# EAGLE board motherboard_clean (EAGLE 8.5.0)
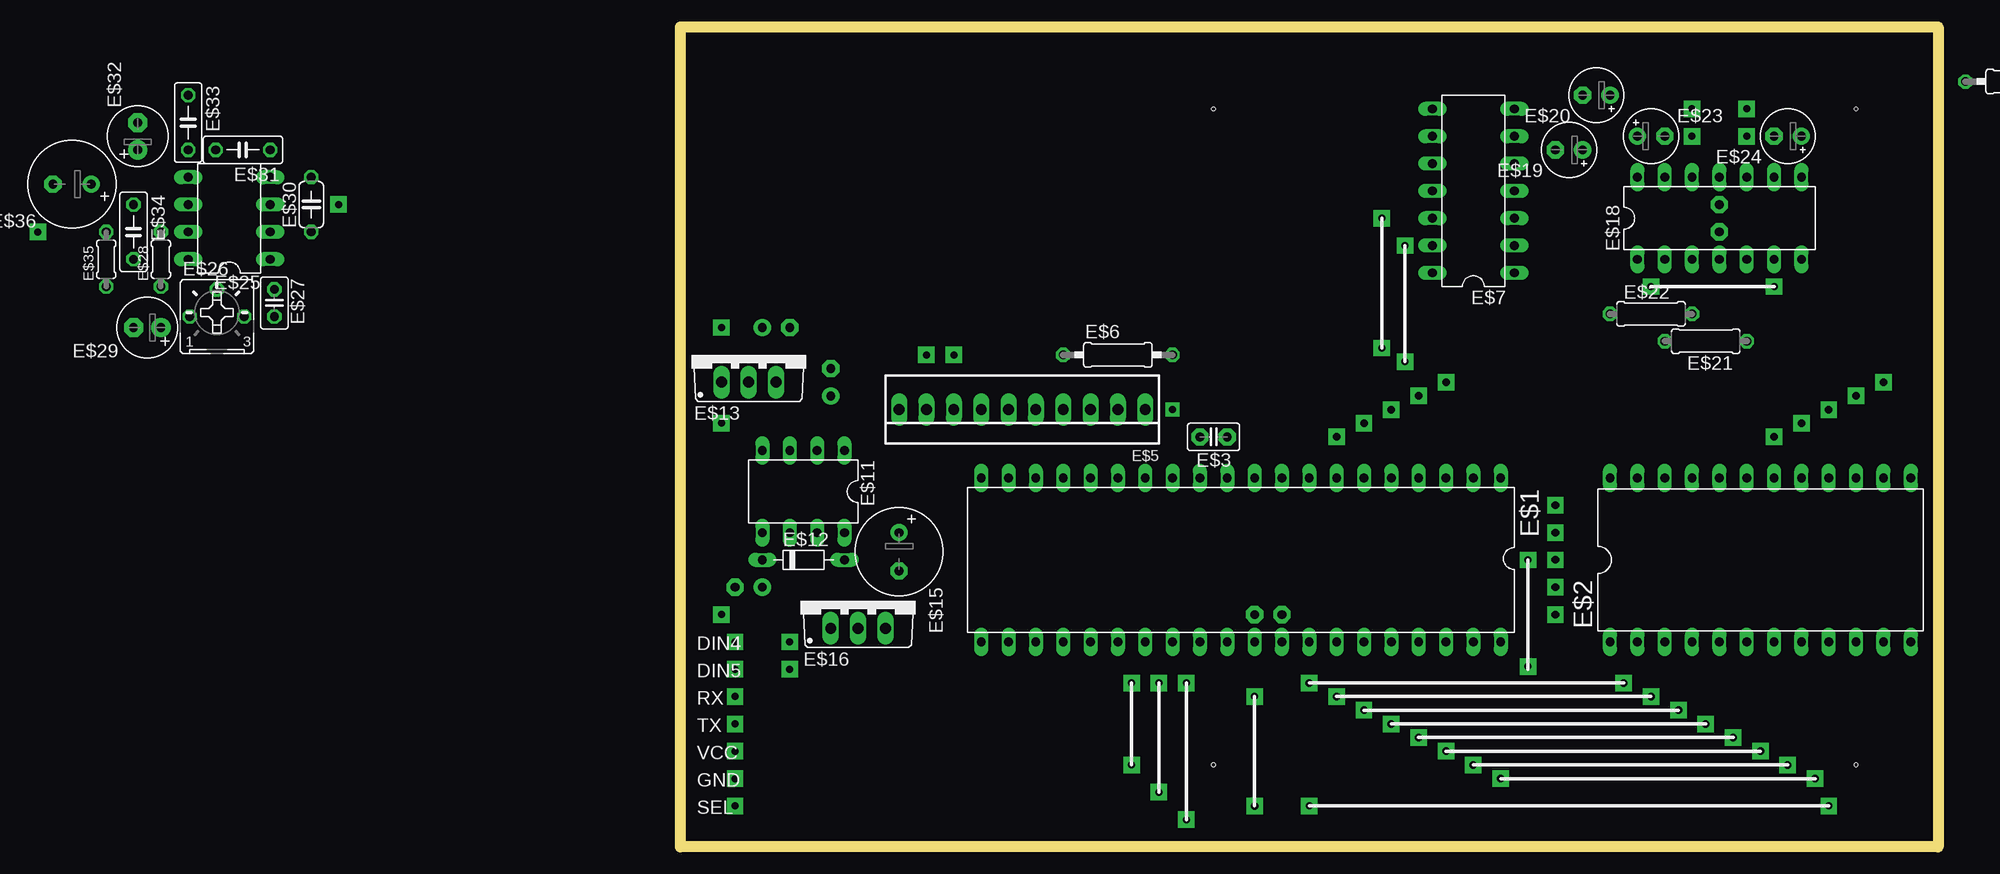
[diagram p0: board, top side]
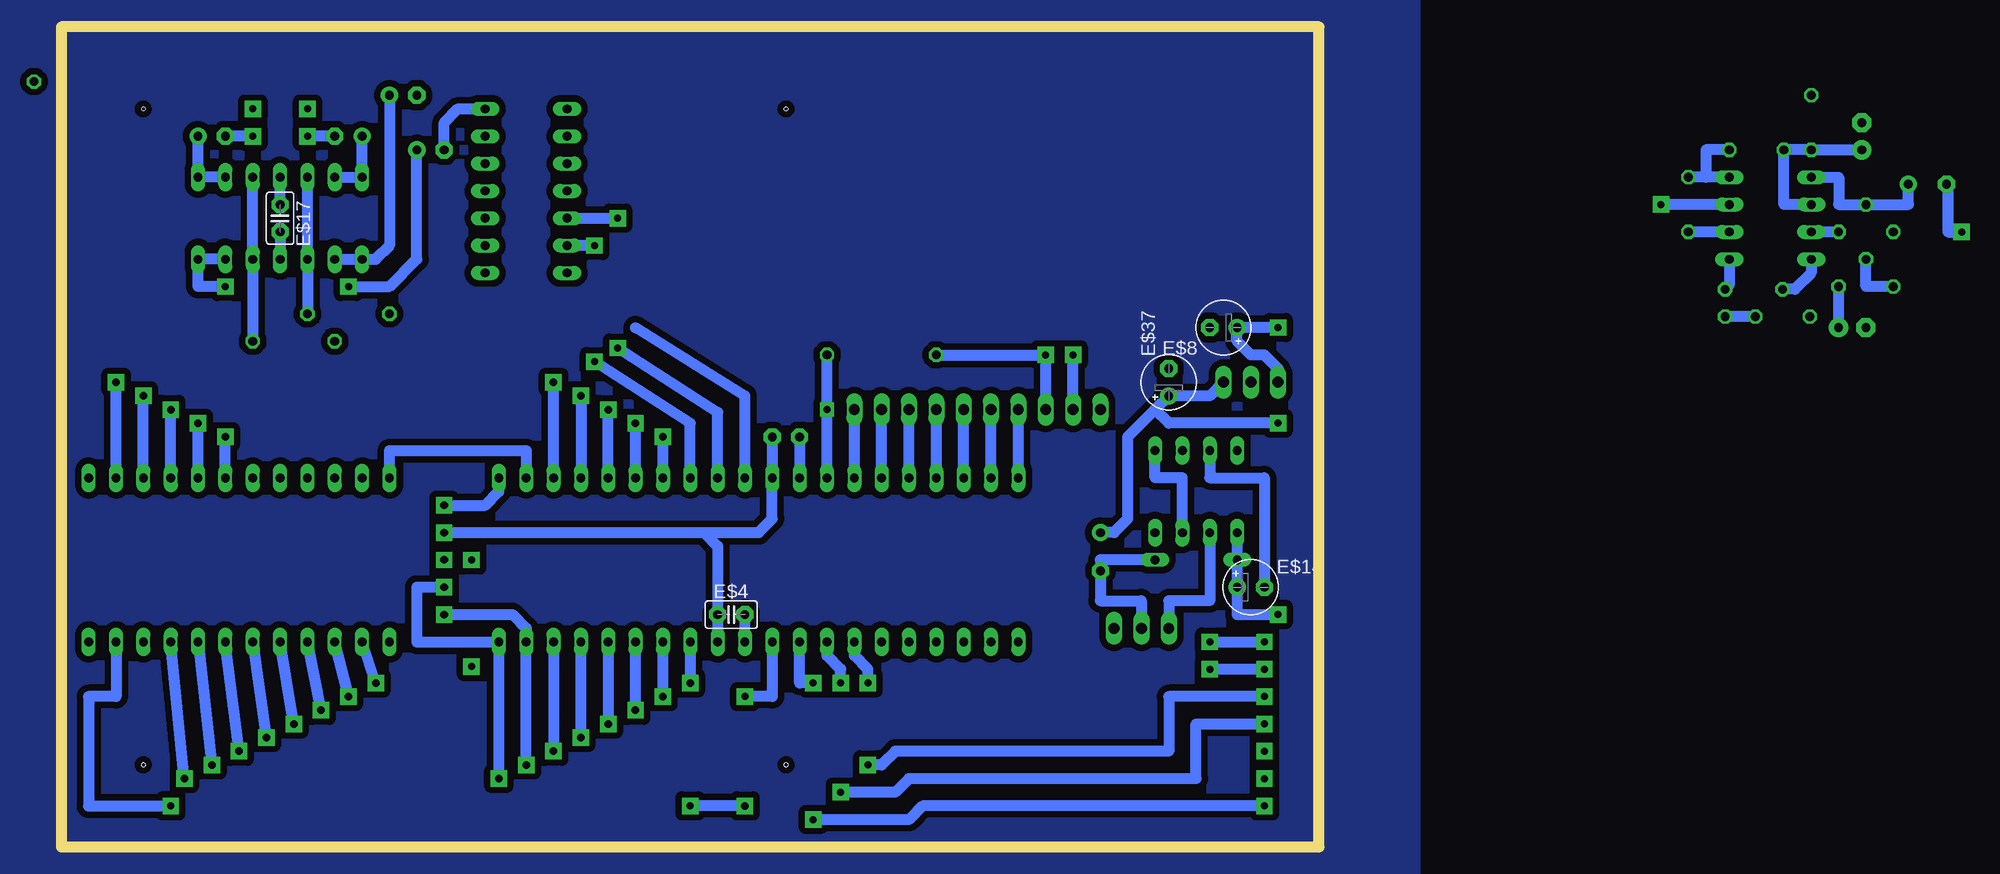
[diagram p1: board, bottom side, seen from below]

Size 116.84 x 76.2 mm. Coordinates in mm from the lower left corner, seen from the top.
Outline: 116.84,0 0,0 0,76.2 116.84,76.2 116.84,0
Copper layers (1*16): Top 0.035mm / dielectric 1.5mm / Bottom 0.035mm
Design rules "default *": minimum track width 6mil, minimum drill 0.35mm, track to track 6mil, track to pad 6mil, pad to pad 6mil, via to via 6mil, smd to smd 6mil, copper to edge 0mil, drill to drill 6mil, minimum pad ring 10mil, minimum via ring 8mil, stop-mask expansion 4mil, vias tented up to drill 0mil, thermal gap 10mil
Holes 0.35 mm at 109.22,7.62 49.53,7.62 109.22,68.58 49.53,68.58

## Footprints (pad centres in the part's own frame; a part is rotated, then mirrored left to right if it is on the bottom)
DIL40 = drill 0.813 long: 1 -24.13,-7.62; 2 -21.59,-7.62; 3 -19.05,-7.62; 4 -16.51,-7.62; 5 -13.97,-7.62; 6 -11.43,-7.62; 7 -8.89,-7.62; 8 -6.35,-7.62; 9 -3.81,-7.62; 10 -1.27,-7.62; 11 1.27,-7.62; 12 3.81,-7.62; 13 6.35,-7.62; 14 8.89,-7.62; 15 11.43,-7.62; 16 13.97,-7.62; 17 16.51,-7.62; 18 19.05,-7.62; 19 21.59,-7.62; 20 24.13,-7.62; 21 24.13,7.62; 22 21.59,7.62; 23 19.05,7.62; 24 16.51,7.62; 25 13.97,7.62; 26 11.43,7.62; 27 8.89,7.62; 28 6.35,7.62; 29 3.81,7.62; 30 1.27,7.62; 31 -1.27,7.62; 32 -3.81,7.62; 33 -6.35,7.62; 34 -8.89,7.62; 35 -11.43,7.62; 36 -13.97,7.62; 37 -16.51,7.62; 38 -19.05,7.62; 39 -21.59,7.62; 40 -24.13,7.62
DIL24-6 = drill 0.813 long: 1 -13.97,-7.62; 2 -11.43,-7.62; 3 -8.89,-7.62; 4 -6.35,-7.62; 5 -3.81,-7.62; 6 -1.27,-7.62; 7 1.27,-7.62; 8 3.81,-7.62; 9 6.35,-7.62; 10 8.89,-7.62; 11 11.43,-7.62; 12 13.97,-7.62; 13 13.97,7.62; 14 11.43,7.62; 15 8.89,7.62; 16 6.35,7.62; 17 3.81,7.62; 18 1.27,7.62; 19 -1.27,7.62; 20 -3.81,7.62; 21 -6.35,7.62; 22 -8.89,7.62; 23 -11.43,7.62; 24 -13.97,7.62
C2.5-2 = drill 0.813 pad 1.6 octagon: 1 -1.27,0; 2 1.27,0
22-23-2101 = drill 1 long: 1 -11.43,0; 2 -8.89,0; 3 -6.35,0; 4 -3.81,0; 5 -1.27,0; 6 1.27,0; 7 3.81,0; 8 6.35,0; 9 8.89,0; 10 11.43,0
0207/10 = drill 0.813 octagon: 1 -5.08,0; 2 5.08,0
DIL14 = drill 0.813 long: 1 -7.62,-3.81; 2 -5.08,-3.81; 3 -2.54,-3.81; 4 0,-3.81; 5 2.54,-3.81; 6 5.08,-3.81; 7 7.62,-3.81; 8 7.62,3.81; 9 5.08,3.81; 10 2.54,3.81; 11 0,3.81; 12 -2.54,3.81; 13 -5.08,3.81; 14 -7.62,3.81
E2,5-5 = drill 0.813 pad 1.6: + -1.27,0 | drill 0.813 pad 1.6 octagon: - 1.27,0
DIL08 = drill 0.813 long: 1 -3.81,-3.81; 2 -1.27,-3.81; 3 1.27,-3.81; 4 3.81,-3.81; 5 3.81,3.81; 6 1.27,3.81; 7 -1.27,3.81; 8 -3.81,3.81
D-7.5 = drill 0.813 long: A 3.81,0; C -3.81,0
TO220V = drill 1.016 long: 1 -2.54,-2.54; 2 0,-2.54; 3 2.54,-2.54
E3,5-8 = drill 0.813 pad 1.6: + -1.778,0 | drill 0.813 pad 1.6 octagon: - 1.778,0
0207/7 = drill 0.813 octagon: 1 -3.81,0; 2 3.81,0
B25P = drill 0.813 octagon: A -2.54,0; E 2.54,0; S 0,2.54
C025-025X050 = drill 0.813 octagon: 1 -1.27,0; 2 1.27,0
0204/5 = drill 0.813 octagon: 1 -2.54,0; 2 2.54,0
E2,5-6 = drill 0.813 pad 1.778: + -1.27,0 | drill 0.813 pad 1.778 octagon: - 1.27,0
C050-024X044 = drill 0.813 octagon: 1 -2.54,0; 2 2.54,0
C050-025X075 = drill 0.813 octagon: 1 -2.54,0; 2 2.54,0

## Placement (x,y rotation side)
E$1  [DIL40]  52.07,26.67 180 top
E$2  [DIL24-6]  100.33,26.67 0 top
E$3  [C2.5-2]  49.53,38.1 180 top
E$4  [C2.5-2]  54.61,21.59 0 bottom
E$5  [22-23-2101]  31.75,40.64 180 top
E$6  [0207/10]  40.64,45.72 0 top
E$7  [DIL14]  73.66,60.96 90 top
E$8  [E2,5-5]  8.89,48.26 180 bottom
E$10  [0207/10]  124.46,71.12 180 top
E$11  [DIL08]  11.43,33.02 180 top
E$12  [D-7.5]  11.43,26.67 0 top
E$13  [TO220V]  6.35,45.72 0 top
E$14  [E2,5-5]  6.35,24.13 0 bottom
E$15  [E3,5-8]  20.32,27.43 270 top
E$16  [TO220V]  16.51,22.86 0 top
E$17  [C2.5-2]  96.52,58.42 270 bottom
E$18  [DIL14]  96.52,58.42 0 top
E$19  [E2,5-5]  82.55,64.77 180 top
E$20  [E2,5-5]  85.09,69.85 180 top
E$21  [0207/7]  95.25,46.99 180 top
E$22  [0207/7]  90.17,49.53 0 top
E$23  [E2,5-5]  90.17,66.04 0 top
E$24  [E2,5-5]  102.87,66.04 180 top
E$25  [DIL08]  -41.91,58.42 90 top  (outside the outline)
E$26  [B25P]  -43.05,49.28 0 top  (outside the outline)
E$27  [C025-025X050]  -37.72,50.55 270 top  (outside the outline)
E$28  [0204/5]  -48.26,54.61 90 top  (outside the outline)
E$29  [E2,5-6]  -49.53,48.26 180 top  (outside the outline)
E$30  [C050-024X044]  -34.29,59.69 90 top  (outside the outline)
E$31  [C050-025X075]  -40.64,64.77 180 top  (outside the outline)
E$32  [E2,5-6]  -50.42,66.04 90 top  (outside the outline)
E$33  [C050-025X075]  -45.72,67.31 270 top  (outside the outline)
E$34  [C050-025X075]  -50.8,57.15 270 top  (outside the outline)
E$35  [0204/5]  -53.34,54.61 90 top  (outside the outline)
E$36  [E3,5-8]  -56.52,61.6 180 top  (outside the outline)
E$37  [E2,5-5]  13.97,43.18 90 bottom

## Library data of the parts
E$1 E$2 = ic-package
E$3 E$4 E$17 = capacitor-wima
E$5 = con-molex
E$6 E$10 E$21 E$22 E$27 E$28 E$30 E$31 E$33-E$35 = BeagleBone_Black_Wireless
E$7 E$11 E$18 E$25 = 40xx
E$8 E$14 E$15 E$19 E$20 E$23 E$24 E$29 E$32 E$36 E$37 = BeagleBone_Blue_R3
E$12 = diode
E$13 E$16 = transistor-pnp
E$26 = pot

## Nets
S$1: E$2.2
S$2: E$2.3
S$3: E$2.4
S$4: E$2.5
S$5: E$2.6
S$6: E$2.7
S$7: E$2.8
S$8: E$2.9
S$9: E$1.33
S$10: E$1.34
S$11: E$1.35
S$12: E$1.36
S$13: E$1.37
S$14: E$1.38
S$15: E$1.14 E$5.1
S$16: E$1.31 E$4.2
S$19: E$1.3
S$20: E$1.2 E$2.24
S$21: E$2.18
S$22: E$2.17
S$23: E$2.16
S$24: E$2.15
S$25: E$2.14
S$26: E$1.4
S$27: E$1.5
S$28: E$1.6
S$29: E$1.7
S$30: E$1.1
S$31: E$1.11 E$1.32 E$3.1
S$33: E$1.40
S$34: E$1.12 E$3.2
S$35: E$1.39
S$36: E$1.15 E$5.2
S$37: E$1.16 E$5.3
S$38: E$1.17 E$5.4
S$39: E$1.18 E$5.5
S$40: E$1.19 E$5.6
S$41: E$1.20 E$5.7
S$42: E$1.13 E$6.2
S$43: E$5.8 E$6.1
S$44: E$2.11
S$45: E$1.30
S$56: E$1.27
S$57: E$1.28
S$59: E$1.29
S$64: E$1.8
S$65: E$11.5 E$12.C
S$66: E$12.A E$15.- E$16.2
S$67: E$11.3 E$14.-
S$68: E$11.1 E$11.7
S$69: E$5.9
S$70: E$11.6 E$16.1
S$71: E$13.3 E$15.+ E$37.+
S$72: E$1.9
S$73: E$18.13 E$18.14 E$23.+
S$74: E$18.1 E$18.2 E$20.+
S$75: E$18.8 E$18.9 E$24.+
S$76: E$23.-
S$77: E$7.13
S$78: E$7.12
S$79: E$25.8 E$26.S
S$80: E$1.10
S$82: E$7.7 E$19.-
S$83: E$26.E E$27.2
S$84: E$18.3 E$18.12 E$22.2
S$85: E$18.5 E$18.10 E$21.1
S$86: E$17.1 E$18.11
S$87: E$17.2 E$18.4
S$88: E$19.+
S$89: E$18.6 E$18.7
S$90: E$24.-
S$93: E$25.7 E$28.2
S$94: E$28.1 E$29.+
S$96: E$25.4 E$30.2 E$31.1
S$97: E$25.2 E$30.1
S$98: E$25.3
S$99: E$25.5 E$34.1 E$36.+
S$100: E$25.1 E$27.1
S$101: E$25.6 E$31.2 E$32.+ E$33.2
S$102: E$34.2 E$35.1
S$104: E$8.+ E$13.1

## Tracks (layer width: path | path; a pad name or v marks a point on that pad's centre or on a via)
GND
  pour Bottom (isolate 0.61): -8.89,81.28 -8.89,-8.89 130.81,-7.62 130.81,82.55
S$1  (via drill 0.7 pad 1.52)
  Bottom 1.016: v87.63,15.24 E$2.2
S$2  (via drill 0.7 pad 1.52)
  Bottom 1.016: v90.17,13.97 E$2.3
S$3  (via drill 0.7 pad 1.52)
  Bottom 1.016: v92.71,12.7 E$2.4
S$4  (via drill 0.7 pad 1.52)
  Bottom 1.016: v95.25,11.43 E$2.5
S$5  (via drill 0.7 pad 1.52)
  Bottom 1.016: E$2.6 v97.79,10.16
S$6  (via drill 0.7 pad 1.52)
  Bottom 1.016: v100.33,8.89 E$2.7
S$7  (via drill 0.7 pad 1.52)
  Bottom 1.016: E$2.8 v102.87,7.62
S$8  (via drill 0.7 pad 1.52)
  Bottom 1.016: v105.41,6.35 E$2.9
S$9  (via drill 0.7 pad 1.52)
  Bottom 1.016: E$1.33 v58.42,15.24
S$10  (via drill 0.7 pad 1.52)
  Bottom 1.016: v60.96,13.97 E$1.34
S$11  (via drill 0.7 pad 1.52)
  Bottom 1.016: v63.5,12.7 E$1.35
S$12  (via drill 0.7 pad 1.52)
  Bottom 1.016: E$1.36 v66.04,11.43
S$13  (via drill 0.7 pad 1.52)
  Bottom 1.016: v68.58,10.16 E$1.37
S$14  (via drill 0.7 pad 1.52)
  Bottom 1.016: E$1.38 v71.12,8.89
S$15
  Bottom 1.016: E$1.14 E$5.1
S$16
  Bottom 1.016: E$1.31 E$4.2
S$19  (via drill 0.7 pad 1.52)
  Bottom 1.016: E$1.3 v71.12,43.18
S$20
  Bottom 1.016: E$2.24 86.36,36.83 73.66,36.83 E$1.2
S$21  (via drill 0.7 pad 1.52)
  Bottom 1.016: E$2.18 v101.6,38.1
S$22  (via drill 0.7 pad 1.52)
  Bottom 1.016: E$2.17 v104.14,39.37
S$23  (via drill 0.7 pad 1.52)
  Bottom 1.016: E$2.16 v106.68,40.64
S$24  (via drill 0.7 pad 1.52)
  Bottom 1.016: E$2.15 v109.22,41.91
S$25  (via drill 0.7 pad 1.52)
  Bottom 1.016: E$2.14 v111.76,43.18
S$26  (via drill 0.7 pad 1.52)
  Bottom 1.016: v68.58,41.91 E$1.4
S$27  (via drill 0.7 pad 1.52)
  Bottom 1.016: E$1.5 v66.04,40.64
S$28  (via drill 0.7 pad 1.52)
  Bottom 1.016: E$1.6 v63.5,39.37
S$29  (via drill 0.7 pad 1.52)
  Bottom 1.016: E$1.7 v60.96,38.1
S$30  (via drill 0.7 pad 1.52)
  Bottom 1.016: v81.28,31.75 77.47,31.75 76.2,33.02 E$1.1
S$31  (via drill 0.7 pad 1.52)
  Bottom 1.016: v81.28,29.21 57.15,29.21 | 57.15,29.21 55.88,27.94 E$1.32 | 57.15,29.21 52.07,29.21 50.8,30.48 E$1.11 E$3.1
S$32  (via drill 0.7 pad 1.52)
  other vias: 81.28,26.67
S$33  (via drill 0.7 pad 1.52)
  Bottom 1.016: v81.28,24.13 83.82,24.13 83.82,19.05 E$1.40 v76.2,6.35
S$34
  Bottom 1.016: E$3.2 E$1.12
S$35  (via drill 0.7 pad 1.52)
  Bottom 1.016: v81.28,21.59 74.93,21.59 73.66,20.32 E$1.39 v73.66,7.62
S$36
  Bottom 1.016: E$1.15 E$5.2
S$37
  Bottom 1.016: E$1.16 E$5.3
S$38
  Bottom 1.016: E$1.17 E$5.4
S$39
  Bottom 1.016: E$1.18 E$5.5
S$40
  Bottom 1.016: E$1.19 E$5.6
S$41
  Bottom 1.016: E$1.20 E$5.7
S$42  (via drill 0.65 pad 1.3)
  Bottom 1.016: E$1.13 v45.72,40.64 E$6.2
S$43  (via drill 0.65 pad 1.52)
  Bottom 1.016: E$6.1 v25.4,45.72 E$5.8
S$44  (via drill 0.65 pad 1.52)
  Bottom 1.016: E$2.11 111.76,13.97 114.3,13.97 114.3,3.81 v106.68,3.81
S$45  (via drill 0.65 pad 1.52)
  Bottom 1.016: E$1.30 50.8,13.97 v53.34,13.97
S$46  (via drill 0.65 pad 1.52)
  other vias: 5.08,6.35
S$47  (via drill 0.65 pad 1.52)
  Bottom 1.016: v5.08,3.81 36.83,3.81 38.1,2.54 v46.99,2.54
S$49  (via drill 0.65 pad 1.52)
  Bottom 1.016: v5.08,16.51 v10.16,16.51
S$50  (via drill 0.65 pad 1.52)
  other vias: 5.08,8.89
S$52  (via drill 0.65 pad 1.52)
  Bottom 1.016: v10.16,19.05 v5.08,19.05
S$53  (via drill 0.65 pad 1.52)
  Bottom 1.016: v5.08,11.43 11.43,11.43 11.43,6.35 38.1,6.35 39.37,5.08 v44.45,5.08
S$55  (via drill 0.65 pad 1.52, 0.7 pad 1.52)
  Bottom 1.016: v53.34,3.81 v58.42,3.81
S$56  (via drill 0.65 pad 1.52)
  Bottom 1.016: v41.91,15.24 41.91,16.51 43.18,17.78 E$1.27
S$57  (via drill 0.65 pad 1.52)
  Bottom 1.016: v44.45,15.24 44.45,16.51 45.72,17.78 E$1.28
S$58  (via drill 0.65 pad 1.52)
  Bottom 1.016: v5.08,13.97 13.97,13.97 13.97,8.89 39.37,8.89 40.64,7.62 v41.91,7.62
S$59  (via drill 0.65 pad 1.52)
  Bottom 1.016: v46.99,15.24 48.26,15.24 E$1.29
S$60  (via drill 0.65 pad 1.52)
  other vias: 78.74,26.67
S$61  (via drill 0.65 pad 1.52)
  other vias: 78.74,16.76
S$64  (via drill 0.65 pad 1.52)
  Bottom 1.016: E$1.8 58.42,39.37 v67.31,45.09
S$65  (via drill 0.65 pad 1.52)
  Bottom 1.016: E$11.5 E$12.C 7.62,21.59 v3.81,21.59
S$66
  Bottom 1.016: E$12.A 20.32,26.67 E$15.- 20.32,22.86 16.51,22.86 E$16.2
S$67
  Bottom 1.016: E$11.3 10.16,34.29 5.08,34.29 E$14.-
S$68
  Bottom 1.016: E$11.7 12.7,34.29 15.24,34.29 E$11.1
S$69  (via drill 0.65 pad 1.52)
  Bottom 1.016: E$5.9 v22.86,45.72
S$70
  Bottom 1.016: E$11.6 10.16,22.86 13.97,22.86 E$16.1
S$71  (via drill 0.65 pad 1.52)
  Bottom 1.016: E$13.3 10.16,41.91 E$37.+ 15.24,40.64 | E$15.+ 19.05,29.21 17.78,30.48 17.78,38.1 15.24,40.64 | v3.81,39.37 13.97,39.37 15.24,40.64
S$72  (via drill 0.65 pad 1.52)
  Bottom 1.016: E$1.9 55.88,40.39 v65.15,46.36
S$73
  Bottom 1.016: E$18.13 E$18.14 E$23.+
S$74
  Bottom 1.016: E$18.2 E$18.1 87.63,54.61 86.36,55.88 E$20.+
S$75
  Bottom 1.016: E$18.9 E$18.8 E$24.+
S$76  (via drill 0.65 pad 1.52)
  Bottom 1.016: E$23.- v93.98,66.04
S$77  (via drill 0.65 pad 1.52)
  Bottom 1.016: v67.31,55.88 E$7.13
S$78  (via drill 0.65 pad 1.52)
  Bottom 1.016: E$7.12 v65.15,58.42
S$79
  Bottom 1.016: E$25.8 -45.72,53.34 -44.2,51.82 E$26.S
S$80
  Bottom 1.016: E$1.10 53.34,41.91 63.5,48.26
S$82
  Bottom 1.016: E$19.- 81.28,67.31 80.01,68.58 E$7.7
S$83
  Bottom 1.016: E$26.E E$27.2
S$84
  Bottom 1.016: E$18.12 E$18.3 E$22.2
S$85
  Bottom 1.016: E$18.10 E$18.5 E$21.1
S$86
  Bottom 1.016: E$17.1 E$18.11
S$87
  Bottom 1.016: E$17.2 E$18.4
S$88  (via drill 0.65 pad 1.52)
  Bottom 1.016: v90.17,52.07 86.36,52.07 83.82,54.61 E$19.+
S$89  (via drill 0.65 pad 1.52)
  Bottom 1.016: E$18.6 E$18.7 104.14,52.07 v101.6,52.07
S$90  (via drill 0.65 pad 1.52)
  Bottom 1.016: v99.06,66.04 E$24.-
S$91  (via drill 0.65 pad 1.52)
  other vias: 93.98,68.58
S$92  (via drill 0.65 pad 1.52)
  other vias: 99.06,68.58
S$93
  Bottom 1.016: E$28.2 E$25.7
S$94
  Bottom 1.016: E$29.+ E$28.1
S$96
  Bottom 1.016: E$25.4 -35.94,62.23 | -35.94,62.23 E$30.2 | E$31.1 -35.94,64.77 -35.94,62.23
S$97
  Bottom 1.016: E$25.2 E$30.1
S$98  (via drill 0.65 pad 1.52)
  Bottom 1.016: E$25.3 v-31.75,59.69
S$99
  Bottom 1.016: E$25.5 -48.26,62.23 -48.26,59.69 E$34.1 -54.74,59.69 E$36.+
S$100
  Bottom 1.016: E$25.1 -38.1,52.2 E$27.1
S$101
  Bottom 1.016: E$32.+ E$33.2 E$31.2 -43.18,59.69 E$25.6
S$102
  Bottom 1.016: E$35.1 -50.8,52.07 E$34.2
S$103  (via drill 0.65 pad 1.52)
  Bottom 1.016: -58.42,60.96 -58.42,57.15 v-59.69,57.15
S$104  (via drill 0.65 pad 1.52)
  Bottom 1.016: E$13.1 3.81,44.45 5.08,45.72 6.35,45.72 7.62,46.99 E$8.+ v3.81,48.26

## Text on the board
tPlace: DIN4 | DIN5 | RX | TX | VCC | GND | SEL